# Altium PCB AVR-TAG.PcbDoc
Units mm, origin at the board's own origin, x right, y up, seen from the top; angles counter-clockwise.
Board outline 35.69 x 15.49 mm, 2 copper layers (Top Layer, Bottom Layer); 2 components, 6 nets, 14 pads, 0 vias.
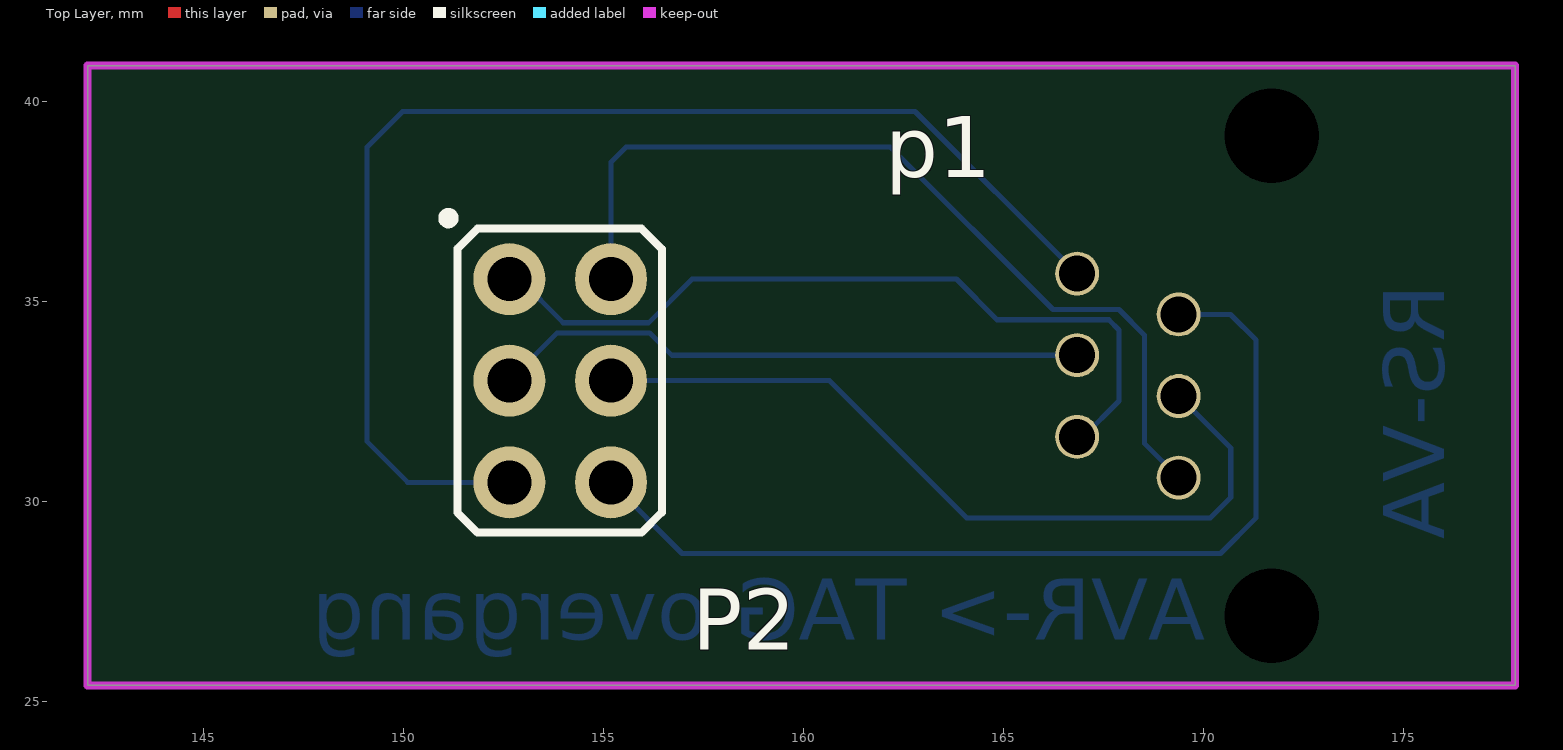
[diagram p0: Top Layer view]
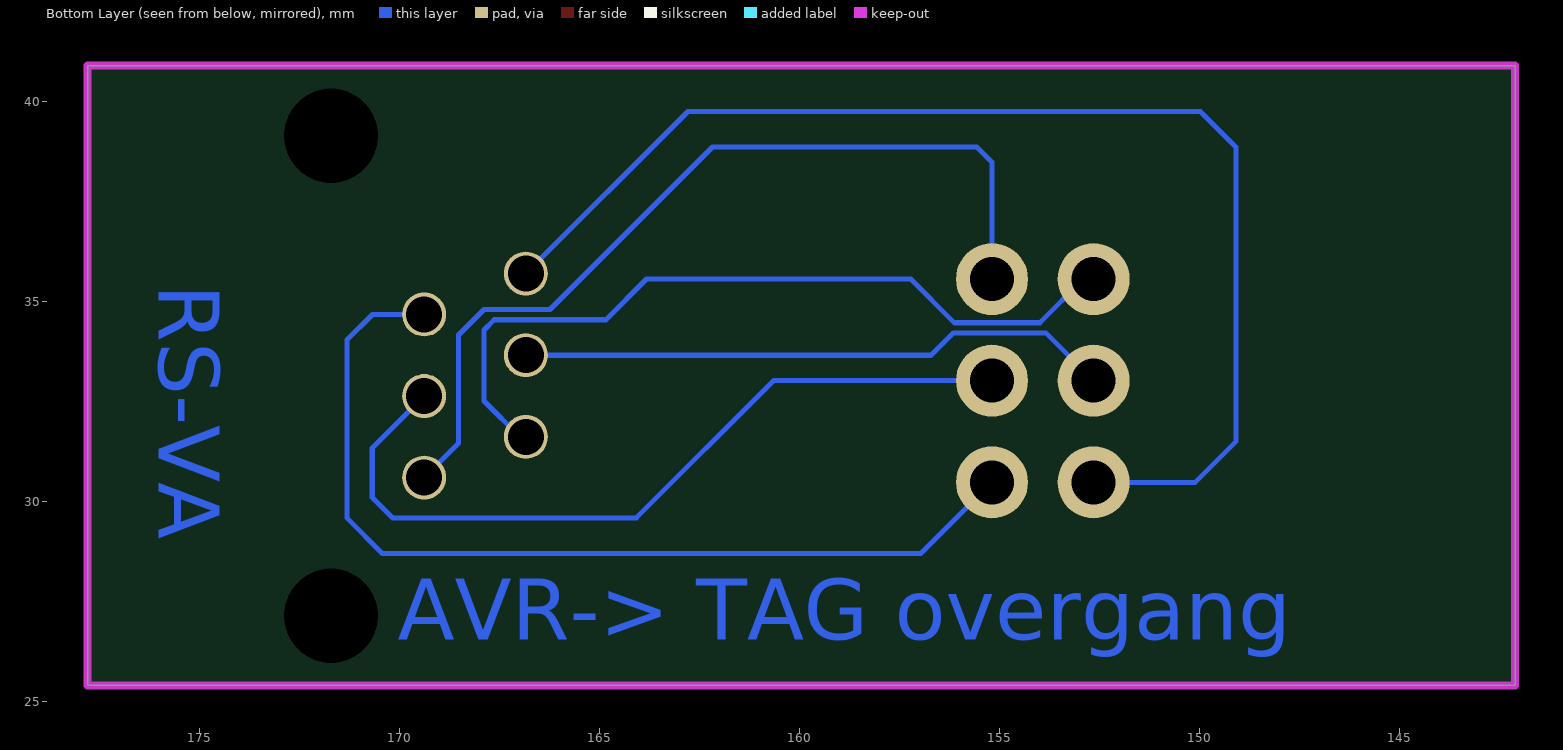
[diagram p1: Bottom Layer view, seen from below]

## Layer stack, top to bottom
Top Solder: solder mask 0.0102, Solder Resist, Dk 3.5
Top Layer: signal copper 0.0356
Dielectric 1: dielectric 0.32, FR-4, Dk 4.8
Bottom Layer: signal copper 0.0356
Bottom Solder: solder mask 0.0102, Solder Resist, Dk 3.5

## Board outline
142.113,25.4 142.113,40.894 177.8,40.894 177.8,25.4

## Design rules (kind name [scope] priority, off if disabled: settings)
Clearance [All] p1: gap=0.127 ignorepadtopadclearanceinfootprint=FALSE except(0: Arc-Hole Track-Hole SMDPad-Hole THPad-Hole Via-Hole Fill-Hole Poly-Hole Region-Hole Text-Hole; 0.254: Fill-Fill Fill-Poly Fill-Region Fill-Text Poly-Poly Poly-Region Poly-Text Region-Region Region-Text Text-Text)
PolygonConnect [All] p1: connectstyle=Relief reliefconductorwidth=0.254 reliefentries=4 polygonreliefangle="90 Angle" airgapwidth=0.254
RoutingVias [All] p1: holewidth=0.711 width=1.27 viastyle="Through Hole" minholewidth=0.711 minwidth=1.27 maxholewidth=0.711 maxwidth=1.27
SolderMaskExpansion [All] p1: expansion=0.102
Width [All] p1: maxlimit=0.508 minlimit=0.127 preferedwidth=0.254
30 further rules are at their usual default settings.

## Components (designator, comment, footprint, x,y, rotation, side; value= is the part's Value field where it differs from the comment)
p1 "RJ11-6" RJ11-6pin 169.418,33.147 r90 top
P2 "2X3 BoxHeader-Angled" "2X3 BOX HEADER-ANGLED" 153.924,33.02 r90 top

## Footprints (in the part's own frame and the unit in brackets; to place one, negate y for a bottom-side part, rotate by r counter-clockwise, add the part's x,y. Pads: shape width x height; smd on the part's side, far side on the other; paste and mask are expansions set on the pad)
"2X3 BOX HEADER-ANGLED" [mm]
  round 1.8 hole 1.1: 1(2.54,1.27) 2(2.54,-1.27) 3(0,1.27) 4(0,-1.27) 5(-2.54,1.27) 6(-2.54,-1.27)
  silkscreen extent -3.8,-2.54 4.19,2.92, body extent -7.62,-1.53 7.8,11.73, height 9.4
RJ11-6pin [mm] "6pin version"
  round 0 hole 2.36 unplated: 0(-6,-2.3) 0(6,-2.3)
  round 1.1 hole 0.9: 1(2.55,2.57) 2(1.53,0.03) 3(0.51,2.57) 4(-0.51,0.03) 5(-1.53,2.57) 6(-2.55,0.03)
  body extent -7.2,-8.4 7.2,4.6, height 14.5

## Nets (pads, with @x,y where several pads share a name; then routed paths per layer and width w, separated by ;. In a path a pad name is that pad's centre, name@x,y a point inside that pad or via, vN(x,y) a via of type N, cw(c..) or ccw(c..) an arc to the next point about the centre after c; other vN are vias at no path point)
Netp1_1: p1.1 P2.5 | length 31.1
  Bottom Layer w0.127: P2.5 150.114,30.48 149.098,31.496 149.098,38.862 149.987,39.751 162.794,39.751 p1.1
Netp1_2: p1.2 P2.6 | length 23.9
  Bottom Layer w0.127: P2.6 156.972,28.702 170.434,28.702 171.323,29.591 171.323,34.036 170.682,34.677 p1.2
Netp1_3: p1.3 P2.3 | length 14.9
  Bottom Layer w0.127: P2.3 153.849,34.215 156.158,34.215 156.716,33.657 p1.3
Netp1_4: p1.4 P2.4 | length 20.2
  Bottom Layer w0.127: P2.4 160.655,33.02 164.084,29.591 170.18,29.591 170.688,30.099 170.688,31.337 p1.4
Netp1_5: p1.5 P2.1 | length 19.9
  Bottom Layer w0.127: P2.1 152.908,35.56 153.999,34.469 156.135,34.469 157.226,35.56 163.83,35.56 164.846,34.544 167.64,34.544 167.894,34.29 167.894,32.512 166.999,31.617 p1.5
Netp1_6: p1.6 P2.2 | length 22.3
  Bottom Layer w0.127: P2.2 155.194,38.481 155.575,38.862 162.179,38.862 166.243,34.798 167.894,34.798 168.529,34.163 168.529,31.456 p1.6
pads on no net: p1.0

## Keep-outs
Keep-Out Layer:
  the board outline again, w0.2

## Other copper
Bottom Layer:
  text "RS-VA" at 176.022,35.433 h1.52 r90
  text "AVR-> TAG overgang" at 170.053,26.543 h1.52